# Altium PCB 第三版PCB_ASCII.pcbdoc (part 1 of 2)
Units mm, origin at the board's own origin, x right, y up, seen from the top; angles counter-clockwise.
Board outline 100 x 24 mm, 4 copper layers (Top Layer, GND, VCC, Bottom Layer), stack 0.568 mm thick; 97 components, 64 nets, 369 pads, 320 vias.
Unrouted connection lines stored in the file: 80.
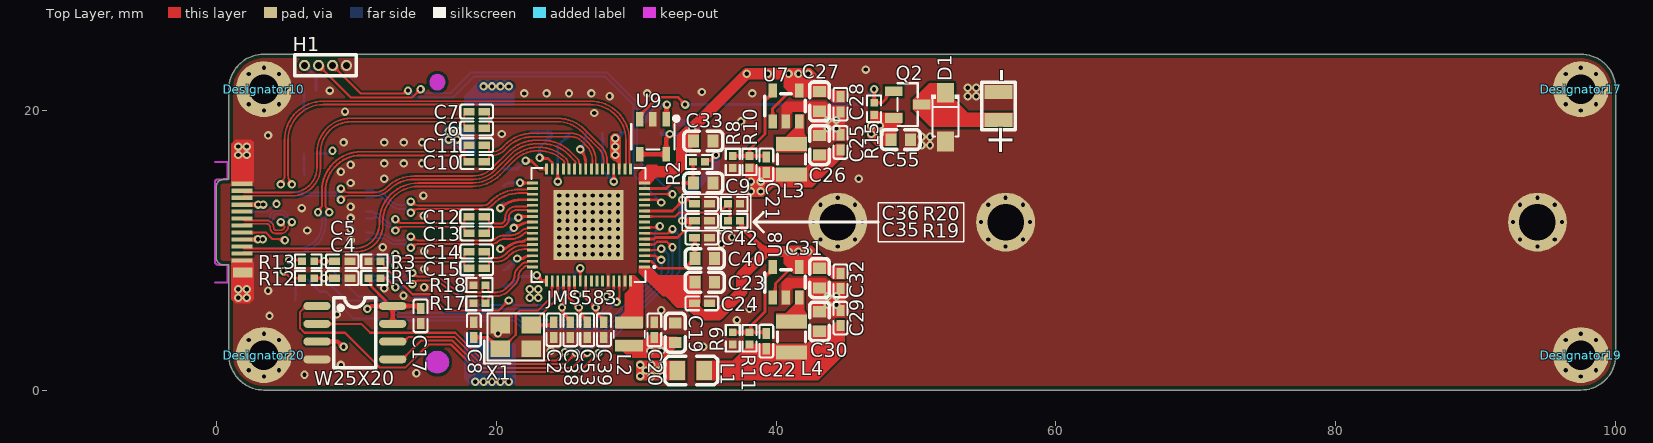
[diagram p0: Top Layer view]
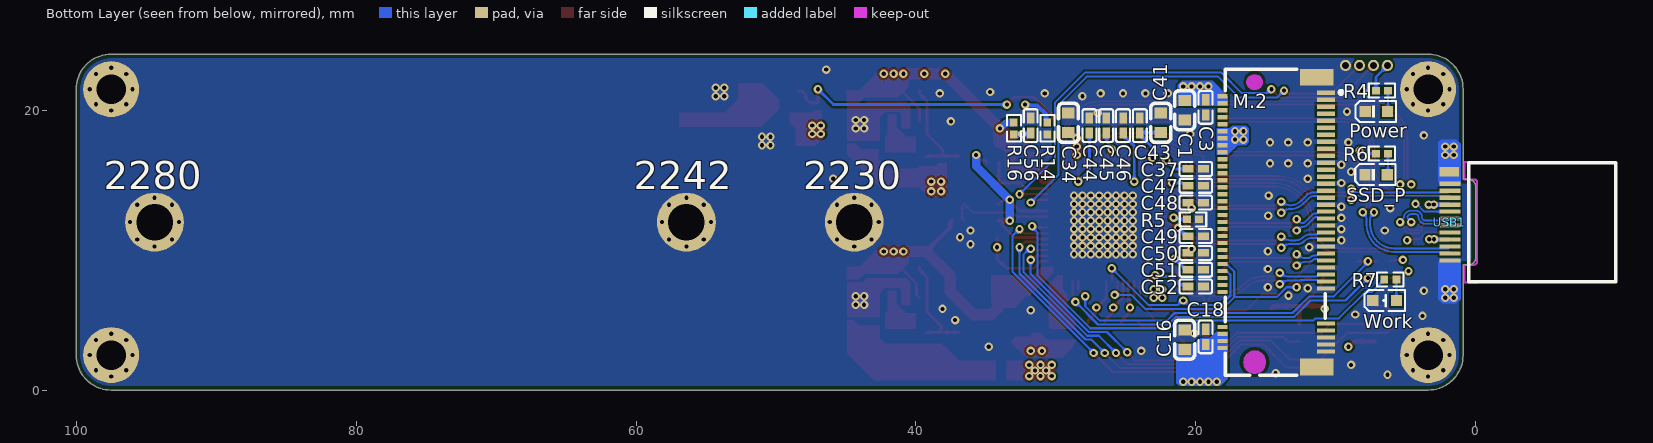
[diagram p1: Bottom Layer view, seen from below]
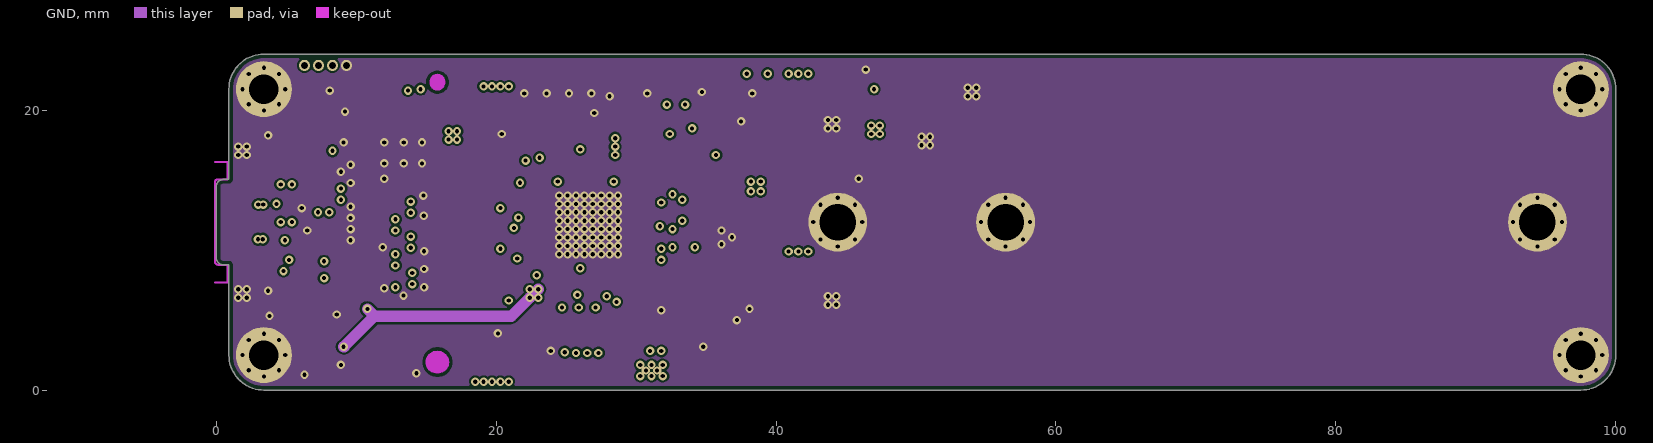
[diagram p2: GND]
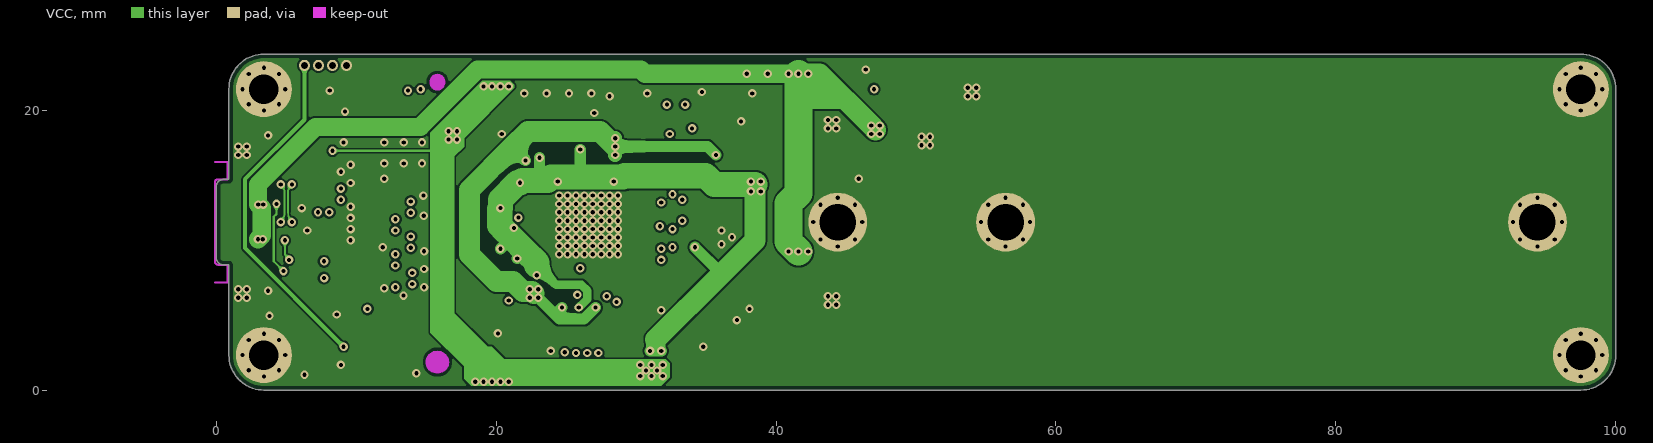
[diagram p3: VCC]

## Layer stack, top to bottom
Top Solder Mask Layer: solder mask 0.0102, Solder Resist, Dk 3.5
Top Layer: signal copper 0.035
Dielectric 1: prepreg 0.0711, PP-006, Dk 4.1
GND: signal copper 0.018
Dielectric1: dielectric 0.32, FR-4, Dk 4.8
VCC: signal copper 0.018
Dielectric 2: prepreg 0.0711, PP-006, Dk 4.1
Bottom Layer: signal copper 0.035
Bottom Solder Mask Layer: solder mask 0.0102, Solder Resist, Dk 3.5

## Board outline
0.9,2.5 0.9,8.95 0.5,8.95 cw(c0.5,9.45) 0,9.45 0,14.55 cw(c0.5,14.55) 0.5,15.05 0.9,15.05 0.9,21.5 cw(c3.4,21.5) 3.4,24 97.5,24 cw(c97.5,21.5) 100,21.5 100,2.5 cw(c97.5,2.5) 97.5,0 3.4,0 cw(c3.4,2.5)

## Design rules (kind name [scope] priority, off if disabled: settings)
BoardOutlineClearance copperThickness1oz_1 [All] p1: gap=0.254 ignorepadtopadclearanceinfootprint=FALSE except(0: Arc-SplitContinuation Track-SplitContinuation SMDPad-SplitContinuation THPad-SplitContinuation Via-SplitContinuation Fill-SplitContinuation Poly-SplitContinuation Region-SplitContinuation Text-SplitContinuation; 0.152: Track-CutoutEdge SMDPad-CutoutEdge THPad-CutoutEdge Via-CutoutEdge Region-CutoutEdge; 0.3: Track-OutlineEdge SMDPad-OutlineEdge THPad-OutlineEdge Via-OutlineEdge Fill-OutlineEdge Fill-CutoutEdge Poly-OutlineEdge Region-OutlineEdge Text-OutlineEdge)
BoardOutlineClearance copperThickness2oz_1 [All] p2: gap=0.254 ignorepadtopadclearanceinfootprint=FALSE except(0: Arc-SplitContinuation Track-SplitContinuation SMDPad-SplitContinuation THPad-SplitContinuation Via-SplitContinuation Fill-SplitContinuation Poly-SplitContinuation Region-SplitContinuation Text-SplitContinuation; 0.152: Track-CutoutEdge SMDPad-CutoutEdge THPad-CutoutEdge Via-CutoutEdge Region-CutoutEdge; 0.3: Track-OutlineEdge SMDPad-OutlineEdge THPad-OutlineEdge Via-OutlineEdge Fill-OutlineEdge Fill-CutoutEdge Poly-OutlineEdge Region-OutlineEdge Text-OutlineEdge)
Clearance "Stitching GND" [IsStitchingVia and InNet('GND') vs (IsVia and (Not IsStitchingVia)) Or IsPad] p1: gap=0.2 ignorepadtopadclearanceinfootprint=FALSE except(0: Arc-Text Arc-Hole Track-Text Track-Hole SMDPad-Text SMDPad-Hole THPad-Text THPad-Hole Via-Text Via-Hole Fill-Text Fill-Hole Poly-Text Poly-Hole Region-Text Region-Hole Text-Text Text-Hole)
Clearance copperThickness1oz [All] p2: gap=0.15 ignorepadtopadclearanceinfootprint=FALSE except(0: Arc-Text Arc-Hole Track-Text Track-Hole SMDPad-Via SMDPad-Text SMDPad-Hole THPad-Via THPad-Text THPad-Hole Via-Text Via-Hole Fill-Text Fill-Hole Poly-Text Poly-Hole Region-Text Region-Hole Text-Text Text-Hole; 0.12: Arc-Arc Arc-Track Arc-Via Track-Track Track-Via; 0.2: Via-Via)
ComponentClearance [All] p1: gap=0 collisioncheckmode=3 verticalgap=0.254 showdistances=FALSE
DiffPairsRouting DiffPairsRouting_90oum [InDifferentialPairClass('USB')] p1: maxlimit=0.254 minlimit=0.1 mostfreqgap=0.12 toplayer_minwidth=0.1 toplayer_maxwidth=0.381 toplayer_prefwidth=0.125 midlayer1_minwidth=0.1 midlayer1_maxwidth=0.381 midlayer1_prefwidth=0.125 midlayer2_minwidth=0.1 midlayer2_maxwidth=0.381 midlayer2_prefwidth=0.125 bottomlayer_minwidth=0.1 bottomlayer_maxwidth=0.381 bottomlayer_prefwidth=0.125 maxuncoupledlength=12.7
DiffPairsRouting DiffPairsRouting_85oum [InDifferentialPairClass('NVme')] p2: maxlimit=0.254 minlimit=0.1 mostfreqgap=0.12 toplayer_minwidth=0.1 toplayer_maxwidth=0.381 toplayer_prefwidth=0.145 midlayer1_minwidth=0.1 midlayer1_maxwidth=0.381 midlayer1_prefwidth=0.145 midlayer2_minwidth=0.1 midlayer2_maxwidth=0.381 midlayer2_prefwidth=0.145 bottomlayer_minwidth=0.1 bottomlayer_maxwidth=0.381 bottomlayer_prefwidth=0.145 maxuncoupledlength=12.7
MatchedLengths [All] p1: tolerance=2 checknetsindiffpair=TRUE checkdiffpairvsdiffpair=FALSE checkxsignals=FALSE checkothers=FALSE
PasteMaskExpansion pasteMaskExpansion [All] p1: expansion=0
PlaneConnect innerPlane [All] p1: planeconnectstyle=Direct reliefexpansion=0.508 reliefentries=4 reliefconductorwidth=0.254 reliefairgap=0.254
PolygonConnect copperRegion [All] p1: connectstyle=Direct reliefconductorwidth=0.254 reliefentries=4 polygonreliefangle="90 Angle" airgapwidth=0.254
RoutingVias viaSize [All] p1: holewidth=0.3 width=0.6 viastyle="Through Hole" minholewidth=0.3 minwidth=0.6 maxholewidth=6.3 maxwidth=10
SilkToSilkClearance [All] p1: silktosilkclearance=0
SilkToSolderMaskClearance [IsPad] p1: minsilkscreentomaskgap=0 clearancetoexposedcopper=TRUE
SolderMaskExpansion solderMaskExpansion [All] p1: expansion=0.051 istentingtop=FALSE useseparateexpansions=TRUE expansionbottom=0.051 istentingbottom=FALSE
SupplyNets "Schematic Supply Nets_5" [InNet('VCC')] p1: voltage=0.000
SupplyNets "Schematic Supply Nets_4" [InNet('M.2_3V3')] p2: voltage=0.000
SupplyNets "Schematic Supply Nets_3" [InNet('AVDDL')] p3: voltage=0.000
SupplyNets "Schematic Supply Nets_2" [InNet('GND')] p4: voltage=0.000
SupplyNets "Schematic Supply Nets_1" [InNet('VDDREG')] p5: voltage=0.000
SupplyNets "Schematic Supply Nets" [InNet('3V3')] p6: voltage=0.000
Width copperThickness1oz_2 [All] p1: maxlimit=5 minlimit=0.1 preferedwidth=0.254
24 further rules are at their usual default settings.

## Classes and differential pairs
differential pair class NVme: CLK N_P0_TX N_P1_TX P0_RX P0_TX P1_RX P1_TX
differential pair class USB: D RX1 RX2 TX1 TX2 U_TX1 U_TX2
differential pair N_P1_TX: +N_P1_TX_P -N_P1_TX_N
differential pair N_P0_TX: +N_P0_TX_P -N_P0_TX_N
differential pair U_TX2: +U_TX2_P -U_TX2_N
differential pair U_TX1: +U_TX1_P -U_TX1_N
differential pair TX2: +TX2_P -TX2_N
differential pair TX1: +TX1_P -TX1_N
differential pair RX2: +RX2_P -RX2_N
differential pair RX1: +RX1_P -RX1_N
differential pair P1_TX: +P1_TX_P -P1_TX_N
differential pair P1_RX: +P1_RX_P -P1_RX_N
differential pair P0_TX: +P0_TX_P -P0_TX_N
differential pair P0_RX: +P0_RX_P -P0_RX_N
differential pair D: +D_P -D_N
differential pair CLK: +CLK_P -CLK_N

## Components (designator, comment, footprint, x,y, rotation, side; value= is the part's Value field where it differs from the comment)
C1 "CAP_0603" C0603 20.8,20 r270 bottom
C2 "CL05B104KB54PNC" C0402 24.1,4.3 r90 top
C3 "CL05B104KB54PNC" C0402 19.3,20.2 r90 bottom
C4 "CL05B104KB54PNC" C0402 9,8 r0 top
C5 "CL05B104KB54PNC" C0402 9,9.2 r0 top
C6 "CL05B104KB54PNC" C0402 18.6,18.7 r0 top
C7 "CL05B104KB54PNC" C0402 18.6,19.9 r0 top
C8 "CL05B104KB54PNC" C0402 18.4,4.3 r270 top
C9 "CAP_0603" C0603 34.8,14.8 r180 top
C10 "CL05B104KB54PNC" C0402 18.6,16.3 r0 top
C11 "CL05B104KB54PNC" C0402 18.6,17.5 r0 top
C12 "CL05B104KB54PNC" C0402 18.6,12.4 r180 top
C13 "CL05B104KB54PNC" C0402 18.6,11.2 r180 top
C14 "CL05B104KB54PNC" C0402 18.6,9.9 r180 top
C15 "CL05B104KB54PNC" C0402 18.6,8.7 r180 top
C16 "CAP_0603" C0603 20.8,3.6 r90 bottom
C17 "CL05B104KB54PNC" C0402 14.6,5.3 r90 top
C18 "CL05B104KB54PNC" C0402 19.3,3.8 r270 bottom
C19 "CAP_0603" C0603 32.8,4.1 r270 top
C20 "CL05B104KB54PNC" C0402 31.3,4.3 r270 top
C21 "CL05B104KB54PNC" C0402 39.3,16.1 r90 top
C22 "CL05B104KB54PNC" C0402 39.3,3.5 r90 top
C23 "CAP_0603" C0603 34.9,7.7 r180 top
C24 "CL05B104KB54PNC" C0402 34.7,6.2 r180 top
C25 "CL05B104KB54PNC" C0402 44.6,17.7 r270 top
C26 "CAP_0603" C0603 43.1,17.5 r270 top
C27 "CAP_0603" C0603 43.1,20.625 r90 top
C28 "CL05B104KB54PNC" C0402 44.6,20.425 r90 top
C29 "CL05B104KB54PNC" C0402 44.6,5.145 r270 top
C30 "CAP_0603" C0603 43.1,4.9 r270 top
C31 "CAP_0603" C0603 43.1,8 r90 top
C32 "CL05B104KB54PNC" C0402 44.6,7.8 r90 top
C33 "CAP_0603" C0603 34.8,17.8 r180 top
C34 "CAP_0603" C0603 29.1,19.1 r270 bottom
C35 "CL05B104KB54PNC" C0402 34.7,12.1 r180 top
C36 "CL05B104KB54PNC" C0402 34.7,13.3 r180 top
C37 "CL05B104KB54PNC" C0402 20,15.8 r0 bottom
C38 "CL05B104KB54PNC" C0402 25.3,4.3 r90 top
C39 "CL05B104KB54PNC" C0402 27.7,4.3 r90 top
C40 "CAP_0603" C0603 34.9,9.4 r180 top
C41 "CAP_0603" C0603 22.5,19.1 r270 bottom
C42 "CL05B104KB54PNC" C0402 34.7,10.9 r180 top
C43 "CL05B104KB54PNC" C0402 24,18.9 r270 bottom
C44 "CL05B104KB54PNC" C0402 27.6,18.9 r270 bottom
C45 "CL05B104KB54PNC" C0402 26.4,18.9 r270 bottom
C46 "CL05B104KB54PNC" C0402 25.2,18.9 r270 bottom
C47 "CL05B104KB54PNC" C0402 20,14.6 r0 bottom
C48 "CL05B104KB54PNC" C0402 20,13.4 r0 bottom
C49 "CL05B104KB54PNC" C0402 20,11 r0 bottom
C50 "CL05B104KB54PNC" C0402 20,9.8 r0 bottom
C51 "CL05B104KB54PNC" C0402 20,8.6 r0 bottom
C52 "CL05B104KB54PNC" C0402 20,7.4 r0 bottom
C53 "CL05B104KB54PNC" C0402 26.5,4.3 r90 top
C55 "CAP_0603" C0603 48.9,17.9 r180 top
C56 "CL05B104KB54PNC" C0402 31.8,18.9 r90 bottom
D1 "FR107W_C18199114" SOD-123FL_L2.7-W1.8-LS3.8-RD 52.1,19.5 r270 top
Designator10 "Comment" M2_HOLE 3.4,21.5 r0 top locked
Designator17 "Comment" M2_HOLE 97.5,21.5 r0 top
Designator19 "Comment" M2_HOLE 97.5,2.5 r0 top
Designator20 "Comment" M2_HOLE 3.4,2.5 r0 top locked
H1 "ZX-PZ1.0-1-4PZZ" HDR-TH_ZX-PZ1.0-1-4PZZ 7.8,23.2 r0 top
JMS583 "JMS583" QFN-64_L8.0-W8.0-P0.40-TL-EP6.0 26.6,11.8 r180 top locked (schematic designator U6)
L1 "BLM21PG600SN1D" L0805 33.9,1.4 r180 top
L2 "FTC252010S4R7MBCA" IND-SMD_L2.5-W2.0-VLS252012CX-150M 29.5,4 r90 top
L3 "FTC252012S2R2MBCA" IND-SMD_L2.5-W2.0_MHCHL2520 41.1,16.5 r90 top
L4 "FTC252012S2R2MBCA" IND-SMD_L2.5-W2.0_MHCHL2520 41.1,3.8 r90 top
M.2 "91302-225-067RCM" CONN-SMD_91302-225-067RCM 14.4,12 r270 bottom locked (schematic designator U1)
Power "XL-1608PGC-06" LED0603-RD_GREEN 7.1,19.9 r180 bottom (schematic designator U2)
Q2 "HL3401A" SOT-23-3_L2.9-W1.3-P1.90-LS2.4-BR 49.4,20.4 r180 top
R1 "0402WGF1002TCE" R0402 11.3,8 r180 top
R2 "0402WGF1002TCE" R0402 34.5,16.3 r180 top
R3 "0402WGF1002TCE" R0402 11.3,9.2 r180 top
R4 "0402WGF1002TCE" R0402 6.7,21.4 r180 bottom
R5 "0402WGF1002TCE" R0402 20.2,12.2 r180 bottom
R6 "0402WGF1002TCE" R0402 6.7,16.9 r180 bottom
R7 "0402WGF1002TCE" R0402 6.1,7.9 r180 bottom
R8 "0402WGF1002TCE" R0402 36.9,16.3 r90 top
R9 "0402WGF1002TCE" R0402 36.9,3.7 r90 top
R10 "0402WGF1002TCE" R0402 38.1,16.3 r270 top
R11 "0402WGF1002TCE" R0402 38.1,3.7 r270 top
R12 "0402WGF1002TCE" R0402 6.567,8 r0 top
R13 "0402WGF1002TCE" R0402 6.567,9.2 r0 top
R14 "0402WGF4702TCE" R0402 30.6,18.7 r90 bottom
R15 "0402WGF1002TCE" R0402 47,20.1 r90 top
R16 "0402WGF1002TCE" R0402 33,18.7 r270 bottom
R17 "50Ω_1%" R0402 18.8,6.2 r180 top
R18 "50Ω_1%" R0402 18.8,7.5 r180 top
R19 "100kΩ" R0402 37,12.1 r180 top
R20 "200kΩ" R0402 37,13.3 r0 top
SSD_P "XL-1608PGC-06" LED0603-RD_GREEN 7.119,15.389 r180 bottom (schematic designator U3)
U7 "ETA3409S2F" SOT-23-5_L2.9-W1.6-P0.95-LS2.8-BL 40.7,20.3 r0 top
U8 "ETA3409S2F" SOT-23-5_L2.9-W1.6-P0.95-LS2.8-BL 40.7,7.7 r0 top
U9 "TMP709AIDBVR(UMW)" SOT-23-5_L3.0-W1.5-P0.95-LS2.8-BL 31.2,18.1 r180 top
USB1 "U261-241N-4BS60" USB-TYPE-C-SMD_U261-241N-4BS60 1.875,12 r90 bottom locked
W25X20 "W25X20CLSNIG" SOIC-8_L5.0-W4.0-P1.27-LS6.0-BL 9.9,4.1 r270 top (schematic designator U4)
Work "XL-1608UBC-06A" LED0603-R-RD 6.5,6.4 r180 bottom (schematic designator U5)
X1 "XL2EL89CSI-111YLC-25M" CRYSTAL-SMD_4P-L3.2-W2.5-BL 21.4,3.8 r0 top

## Footprints (in the part's own frame and the unit in brackets; to place one, negate y for a bottom-side part, rotate by r counter-clockwise, add the part's x,y. Pads: shape width x height; smd on the part's side, far side on the other; paste and mask are expansions set on the pad)
C0402 [mm]
  rect 0.79x0.54 smd paste-100 mask+0.051: 1(-0.545,0) 2(0.545,0)
  silkscreen extent -1.17,-0.5 1.17,0.5
C0603 [mm]
  rect 0.8x0.9 smd: 1(-0.7,0) 2(0.7,0)
  silkscreen extent -1.39,-0.71 1.39,0.71
CONN-SMD_91302-225-067RCM [mm]
  rect 0.3x1.3 smd: 1(-9.25,3.7) 3(-8.75,3.7) 5(-8.25,3.7) 7(-7.75,3.7) 9(-7.25,3.7) 11(-6.75,3.7) 13(-6.25,3.7) 15(-5.75,3.7) 17(-5.25,3.7) 19(-4.75,3.7) 21(-4.25,3.7) 23(-3.75,3.7) 25(-3.25,3.7) 27(-2.75,3.7) 29(-2.25,3.7) 31(-1.75,3.7) 33(-1.25,3.7) 35(-0.75,3.7) 37(-0.25,3.7) 39(0.25,3.7) 41(0.75,3.7) 43(1.25,3.7) 45(1.75,3.7) 47(2.25,3.7) 49(2.75,3.7) 51(3.25,3.7) 53(3.75,3.7) 55(4.25,3.7) 57(4.75,3.7) 67(7.25,3.7) 69(7.75,3.7) 71(8.25,3.7) 73(8.75,3.7) 75(9.25,3.7)
  rect 0.3x0.7 smd: 2(-9,-3.7) 4(-8.5,-3.7) 6(-8,-3.7) 8(-7.5,-3.7) 10(-7,-3.7) 12(-6.5,-3.7) 14(-6,-3.7) 16(-5.5,-3.7) 18(-5,-3.7) 20(-4.5,-3.7) 22(-4,-3.7) 24(-3.5,-3.7) 26(-3,-3.7) 28(-2.5,-3.7) 30(-2,-3.7) 32(-1.5,-3.7) 34(-1,-3.7) 36(-0.5,-3.7) 38(0,-3.7) 40(0.5,-3.7) 42(1,-3.7) 44(1.5,-3.7) 46(2,-3.7) 48(2.5,-3.7) 50(3,-3.7) 52(3.5,-3.7) 54(4,-3.7) 56(4.5,-3.7) 58(5,-3.7) 68(7.5,-3.7) 70(8,-3.7) 72(8.5,-3.7) 74(9,-3.7)
  rect 1.2x2.4 smd: 76(-10.35,3.05) 77(10.35,3.05)
  Board Outline Layer board cut-out: 9.2,-1.4 9.261,-1.706 9.434,-1.966 9.694,-2.139 10,-2.2 10,-2.2 10.306,-2.139 10.566,-1.966 10.739,-1.706 10.8,-1.4 10.8,-1.4 10.739,-1.094 10.566,-0.834 10.306,-0.661 10,-0.6 10,-0.6 9.694,-0.661 9.434,-0.834 9.261,-1.094 9.2,-1.4
  Board Outline Layer board cut-out: -10,-1.95 -10.21,-1.908 -10.389,-1.789 -10.508,-1.611 -10.55,-1.4 -10.55,-1.4 -10.508,-1.19 -10.389,-1.011 -10.21,-0.892 -10,-0.85 -10,-0.85 -9.789,-0.892 -9.611,-1.011 -9.492,-1.19 -9.45,-1.4 -9.45,-1.4 -9.492,-1.611 -9.611,-1.789 -9.789,-1.908 -10,-1.95
  Board Outline Layer circle w0.8: c10,-1.4 r0.4
  Board Outline Layer circle w0.005: c-10,-1.4 r0.55
  Board Outline Layer circle w0.7: c-10,-1.4 r0.2
  silkscreen extent -10.92,-3.5 10.92,4.9
CRYSTAL-SMD_4P-L3.2-W2.5-BL [mm]
  rect 1.4x1.2 smd: 1(-1.1,-0.85) 2(1.1,-0.85) 3(1.1,0.85) 4(-1.1,0.85)
  silkscreen extent -2.26,-1.91 2.03,1.68
HDR-TH_ZX-PZ1.0-1-4PZZ [mm]
  round 0.8 hole 0.5: 1(-1.5,0) 2(-0.5,0) 3(0.5,0) 4(1.5,0)
  silkscreen extent -2.2,-0.75 2.2,0.75
IND-SMD_L2.5-W2.0-VLS252012CX-150M [mm]
  rect 0.85x2 smd: 1(-0.83,0) 2(0.83,0)
  silkscreen extent -0.29,-1.1 0.29,1.1
IND-SMD_L2.5-W2.0_MHCHL2520 [mm]
  rect 1x2.2 smd: 1(-1.1,0) 2(1.1,0)
  silkscreen extent -0.37,-1 0.37,1
L0805 [mm]
  rect 1.133x1.377 smd paste-100 mask+0.051: 1(-0.966,0) 2(0.966,0)
  silkscreen extent -1.95,-1.02 1.86,1.02
LED0603-R-RD [mm]
  rect 0.8x0.8 smd: 1(0.851,0) 2(-0.851,0)
  silkscreen extent -1.44,-0.75 1.44,0.75
LED0603-RD_GREEN [mm]
  rect 0.8x0.8 smd: 1(-0.799,-0.003) 2(0.799,0.003)
  silkscreen extent -1.49,-0.75 1.39,0.76
M2_HOLE [mm]
  round 4 hole 2.1: 16(0,0)
QFN-64_L8.0-W8.0-P0.40-TL-EP6.0 [mm]
  rect 0.8x0.2 smd paste-100 mask+0.051: 1(-4,3) 2(-4,2.6) 3(-4,2.2) 4(-4,1.8) 5(-4,1.4) 6(-4,1) 7(-4,0.6) 8(-4,0.2) 9(-4,-0.2) 10(-4,-0.6) 11(-4,-1) 12(-4,-1.4) 13(-4,-1.8) 14(-4,-2.2) 15(-4,-2.6) 16(-4,-3) 33(4,-3) 34(4,-2.6) 35(4,-2.2) 36(4,-1.8) 37(4,-1.4) 38(4,-1) 39(4,-0.6) 40(4,-0.2) 41(4,0.2) 42(4,0.6) 43(4,1) 44(4,1.4) 45(4,1.8) 46(4,2.2) 47(4,2.6) 48(4,3)
  rect 0.2x0.8 smd paste-100 mask+0.051: 17(-3,-4) 18(-2.6,-4) 19(-2.2,-4) 20(-1.8,-4) 21(-1.4,-4) 22(-1,-4) 23(-0.6,-4) 24(-0.2,-4) 25(0.2,-4) 26(0.6,-4) 27(1,-4) 28(1.4,-4) 29(1.8,-4) 30(2.2,-4) 31(2.6,-4) 32(3,-4) 49(3,4) 50(2.6,4) 51(2.2,4) 52(1.8,4) 53(1.4,4) 54(1,4) 55(0.6,4) 56(0.2,4) 57(-0.2,4) 58(-0.6,4) 59(-1,4) 60(-1.4,4) 61(-1.8,4) 62(-2.2,4) 63(-2.6,4) 64(-3,4)
  rect 5x5 smd paste-100 mask+0.051: 65(0,0)
  silkscreen extent -4.77,-4.08 4.08,4.08
R0402 [mm]
  rect 0.566x0.54 smd paste-100 mask+0.051: 1(-0.433,0) 2(0.433,0)
  silkscreen extent -0.94,-0.5 0.94,0.5
SOD-123FL_L2.7-W1.8-LS3.8-RD [mm]
  rect 1.4x1.2 smd: 1(-1.735,0) 2(1.735,0)
  silkscreen extent -1.6,-1 1.38,1
SOIC-8_L5.0-W4.0-P1.27-LS6.0-BL [mil]
  oval 22.38x76.78 smd: 1(-75,-106.5) 2(-25,-106.5) 3(25,-106.5) 4(75,-106.5) 5(75,106.5) 6(25,106.5) 7(-25,106.5) 8(-75,106.5)
  silkscreen extent -98,-59 98,59
SOT-23-3_L2.9-W1.3-P1.90-LS2.4-BR [mm]
  rect 1.25x0.7 smd paste+0 mask+0.051: 1(1,-0.95) 2(1,0.95) 3(-1,0)
  silkscreen extent -0.73,-1.53 0.73,1.53
SOT-23-5_L2.9-W1.6-P0.95-LS2.8-BL [mm]
  rect 0.6x1 smd paste+0 mask+0.05: 1(-0.95,-1.1) 2(0,-1.1) 3(0.95,-1.1) 4(0.95,1.1) 5(-0.95,1.1)
  silkscreen extent -1.52,-0.7 1.4,0.89
SOT-23-5_L3.0-W1.5-P0.95-LS2.8-BL [mm]
  rect 0.532x1.045 smd: 1(-0.95,-1.25) 2(0,-1.25) 3(0.95,-1.25) 4(0.95,1.25) 5(-0.95,1.25)
  silkscreen extent -1.82,-1.45 1.55,0.9
USB-TYPE-C-SMD_U261-241N-4BS60 [mm]
  rect 0.7x1.4 smd far side paste+0 mask+0.05: 1(-3.6,0.025)
  rect 0.7x1.4 smd paste+0 mask+0.05: 2(3.6,0.025)
  rect 0.3x1.5 smd paste+0 mask+0.05: A1(2.75,-0.025) A2(2.25,-0.025) A3(1.75,-0.025) A4(1.25,-0.025) A5(0.75,-0.025) A6(0.25,-0.025) A7(-0.25,-0.025) A8(-0.75,-0.025) A9(-1.25,-0.025) A10(-1.75,-0.025) A11(-2.25,-0.025) A12(-2.75,-0.025)
  rect 0.3x1.5 smd far side paste+0 mask+0.05: B1(-2.75,-0.025) B2(-2.25,-0.025) B3(-1.75,-0.025) B4(-1.25,-0.025) B5(-0.75,-0.025) B6(-0.25,-0.025) B7(0.25,-0.025) B8(0.75,-0.025) B9(1.25,-0.025) B10(1.75,-0.025) B11(2.25,-0.025) B12(2.75,-0.025)
  Board Outline Layer lines w0.15: 2.86,-1.975 ccw(c2.86,-1.785) 3.05,-1.785 ; 2.86,-1.975 ccw(c2.86,-1.785) 3.05,-1.785 ; 2.86,-1.975 -2.741,-1.975 2.86,-1.975 ; 3.05,-1.785 3.05,-1.075 ; 3.05,-1.785 3.05,-1.075 ; -3.05,-1.719 ccw(c-2.794,-1.719) -2.794,-1.975 cw(c-2.794,-1.719) -3.05,-1.719 ; -3.05,-1.719 -3.05,-1.7 ; -3.05,-1.719 -3.05,-1.7 ; -3.05,-1.7 -3.05,-1.075 ; -3.05,-1.7 -3.05,-1.075 ; -4.3,-1.075 -4.3,-1.975 -4.3,-1.075 ; -4.3,-1.075 -3.05,-1.075 ; -4.3,-1.075 -3.05,-1.075 ; 3.05,-1.075 4.3,-1.075 ; 3.05,-1.075 4.3,-1.075 ; 4.3,-1.075 4.3,-1.975 4.3,-1.075
  silkscreen extent -4.25,-11.89 4.25,-1.38

## Part data
R17 R18 R19 R20: library part 0402WGF1002TCE, JLCPCB Part Class=基础库, LCSC Part Name="10kΩ ±1% 62.5mW 厚膜电阻", Manufacturer=UNI-ROYAL(厚声), Operating Temperature=-55℃~+155℃, Power(Watts)=62.5mW, Temperature Coefficient=±100ppm/℃, Tolerance=±1%, Voltage-Supply(Max)=50V, Add into BOM=yes, Convert to PCB=yes, Datasheet=https://item.szlcsc.com/datasheet/0402WGF1002TCE/26487.html, Device=0402WGF1002TCE, Manufacturer Part=0402WGF1002TCE, Supplier=LCSC, Supplier Footprint=0402, Symbol=0402WGF1002TCE, Type=厚膜电阻

## Free pads (board coordinates)
  rect 2x1 smd paste+0 mask+0.05: 1(55.9,19.3) 2(55.9,21.3)
  round 4.2 hole 2.6: 16(44.4,12) 16(56.4,12) 16(94.4,12)

## Via types
v1: diameter 0.6, hole 0.3, Top Layer to Bottom Layer, tented both sides, 320 vias

## Nets (pads, with @x,y where several pads share a name; then routed paths per layer and width w, separated by ;. In a path a pad name is that pad's centre, name@x,y a point inside that pad or via, vN(x,y) a via of type N, cw(c..) or ccw(c..) an arc to the next point about the centre after c; other vN are vias at no path point)
3V3: C22.1 C29.2 C30.2 L1.1 L4.1 R11.2
$1N3363: R6.2 SSD_P.2 | length 1.5
  Bottom Layer w0.15: R6.2@6.267,16.9 6.267,15.445 SSD_P.2@6.319,15.392
$1N3561: R7.2 Work.1 | length 1.5
  Bottom Layer w0.15: Work.1@5.649,6.4 5.667,6.418 R7.2@5.667,7.9
$1N4495: JMS583.39 R5.1 | length 2
  Top Layer w0.2: v1(21.59,12.322) 21.707,12.372 cw(c21.841,12.059) 21.841,12.4 JMS583.39@22.6,12.4
  Bottom Layer w0.2: R5.1@20.633,12.2 21.295,12.2 ccw(c21.295,12.617) v1(21.59,12.322)
$1N10279: C22.2 R9.2 R11.1 U8.5 | length 7.8
  Top Layer w0.2: R9.2@36.9,4.133 R11.1@38.1,4.133 ; C22.2@39.3,4.045 39.212,4.133 R11.1@38.1,4.133 ; U8.5@39.75,8.8 39.75,8.6 39.2,8.05 39.2,5.6 38.198,4.598 38.198,4.231 R11.1@38.1,4.133
$1N10317: L4.2 U8.3
$1N10953: Power.2 R4.2 | length 1.5
  Bottom Layer w0.15: R4.2@6.267,21.4 6.267,19.937 Power.2@6.301,19.903
$1N11538: L3.2 U7.3
$1N11540: C21.2 R8.2 R10.1 U7.5 | length 7.8
  Top Layer w0.2: R8.2@36.9,16.733 R10.1@38.1,16.733 ; C21.2@39.3,16.645 39.212,16.733 R10.1@38.1,16.733 ; U7.5@39.75,21.4 39.75,21.2 39.2,20.65 39.2,18.3 38.1,17.2 R10.1@38.1,16.733
$1N22897: R14.2 U9.1 | length 3.5
  Top Layer w0.3: U9.1@32.15,19.35 32.175,19.375 32.175,20.375 v1(32.2,20.4)
  Bottom Layer w0.3: R14.2@30.6,19.146 30.72,19.266 30.72,19.72 31.343,20.343 32.143,20.343 v1(32.2,20.4)
$1N22946: C56.1 R16.2 U9.4 U9.5 | length 4.7
  Top Layer w0.3: U9.4@30.25,16.85 U9.5@32.15,16.85 32.15,17.969 32.4,18.219 v1(32.4,18.3)
  Bottom Layer w0.3: C56.1@31.8,18.355 31.844,18.311 32.956,18.311 R16.2@33,18.267
$1N23051: Q2.1 R15.2 U9.3 | length 21.1
  Top Layer w0.2: U9.3@30.25,19.35 30.25,19.607 31.564,20.92 32.98,20.92 v1(33.5,20.4) ; v1(47,21.5) R15.2@47,20.533 47.57,20.533 47.875,20.838 47.875,21.1 48.125,21.35 Q2.1@48.4,21.35
  Bottom Layer w0.2: v1(33.5,20.4) 45.9,20.4 v1(47,21.5)
$1N23334: D1.1 pad.1 Q2.3
AVDDL: C19.2 C20.2 C21.1 C25.2 C26.2 C40.2 C41.2 C42.2 C43.2 C44.2 C45.2 C46.2 C47.2 C48.2 C49.2 C50.2 C51.2 C52.2 C53.2 JMS583.2 JMS583.20 JMS583.25 JMS583.30 JMS583.31 JMS583.33 JMS583.36 JMS583.40 JMS583.43 JMS583.46 JMS583.49 JMS583.53 L2.1 L3.1 R10.2 | length 97.2
  Top Layer w0.2: v1(20.3,10.1) 20.575,10.1 ccw(c20.574,10.3) 20.707,10.151 cw(c21.929,8.794) 21.889,10.619 ccw(c21.883,10.819) 22.023,10.677 cw(c22.2,10.5) 22.17,10.748 JMS583.43@22.599,10.8 ; v1(20.3,13) cw(c21.749,11.551) 21.749,13.6 JMS583.36@22.6,13.6 ; v1(21.264,11.592) 21.773,11.834 cw(c22.507,10.293) 22.099,11.95 22.3,12 JMS583.40@22.6,12 ; v1(21.5,9.4) 21.866,9.4 ccw(c21.865,9.6) 22.013,9.466 cw(c22.2,9.3) 22.17,9.548 JMS583.46@22.599,9.6 ; v1(21.7,14.82) 21.7,14.8 JMS583.33@22.6,14.8 ; v1(22.9,8.2) 23.3,7.8 JMS583.49@23.6,7.8 ; v1(23.1,16.6) 23.146,16.554 23.7,16.554 24,16.253 JMS583.31@24,15.8 ; v1(24.4,14.9) JMS583.30@24.4,15.8 ; JMS583.53@25.2,7.8 25.2,6.6 v1(25.9,5.9) 25.977,5.823 25.977,5.494 26.5,4.97 C53.2@26.5,4.845 ; v1(26,17.2) cw(c25.034,16.234) 26.4,16.234 JMS583.25@26.4,15.8 ; v1(28.4,14.9) JMS583.20@28.4,15.8 ; JMS583.2@30.6,9.2 31.1,9.2 31.6,8.7 33.5,8.7 33.85,9.05 33.9,9.05 34.2,9.35 C40.2@34.2,9.4 34.2,10.855 C42.2@34.155,10.9
  VCC w0.6: v1(22.9,8.2) 22.9,8.9 24.28,7.52 26.098,7.52 26.52,7.098 26.52,6.502 26.098,6.08 26.08,6.08 v1(25.9,5.9)
  VCC w0.8: 20.25,11.75 20.408,11.592 ; v1(20.3,10.1) 21.05,10.85 21.15,10.85 ; v1(21.5,9.4) 22.05,9.95 ; v1(23.1,16.6) 23.1,15.56 23.68,14.98 ; v1(26,17.2) 26,15.32 26.1,15.22 ; v1(31,2.8) v1(31.8,2.8) ; v1(34.2,10.2) 36.05,8.35 36.05,8.25
  VCC w1.5: 31.4,3.6 36.05,8.25 38.5,10.7 38.5,14.7
  VCC w1.8: 20.25,11.75 v1@20.25,12.95 ; v1(20.3,13) 20.3,13.6 21.52,14.82 v1(21.7,14.82) 21.86,14.98 23.68,14.98 23.92,15.22 26.1,15.22 29.07,15.22 29.17,15.32 34.967,15.32 35.587,14.7 38.5,14.7 ; 20.408,11.592 21.15,10.85 22.05,9.95 22.9,9.1 22.9,8.9
  Bottom Layer w0.2: v1(20.3,13) cw(c20.674,13) 20.41,13.264 C48.2@20.545,13.4 ; C52.2@20.545,7.4 20.662,7.517 21.117,7.517 21.723,8.123 22.823,8.123 v1(22.9,8.2) ; C51.2@20.545,8.6 ccw(c20.545,8.974) 20.81,8.71 v1(21.5,9.4) ; C49.2@20.545,11 ccw(c20.545,11.307) 20.762,11.09 v1(21.264,11.592) ; C47.2@20.545,14.6 cw(c21.076,14.069) 21.076,14.82 v1(21.7,14.82) ; C41.2@22.5,18.4 C43.2@23.955,18.4 ; v1(23.1,16.6) 23.1,17.33 23.955,18.185 C43.2@23.955,18.4 ; C43.2@24,18.355 C43.2@23.955,18.4 ; v1(24.4,14.9) 24.4,17.43 25.2,18.23 C46.2@25.2,18.355 ; v1(26,17.2) ccw(c25.034,18.166) 26.4,18.166 C45.2@26.4,18.355 ; C44.2@27.6,18.355 27.6,15.7 v1(28.4,14.9)
  other v1: 38.2,14.2 38.9,14.2 38.2,14.9 38.9,14.9
CC1: C4.1 JMS583.62 R12.2 | length 26
  Top Layer w0.15: R12.2@7,8 v1(7.7,8) C4.1@8.455,8 ; v1(28.6,6.3) 28.6,6.422 28.8,6.622 JMS583.62@28.8,7.8
  Bottom Layer w0.15: v1(7.7,8) 9.3,6.4 11.8,6.4 12.965,5.235 21.415,5.235 21.96,4.69 26.99,4.69 v1(28.6,6.3)
CC2: C5.1 JMS583.61 R13.2 | length 25.9
  Top Layer w0.15: R13.2@7,9.2 v1(7.7,9.2) C5.1@8.455,9.2 ; v1(27.9,6.7) 28.4,7.2 JMS583.61@28.4,7.8
  Bottom Layer w0.15: v1(7.7,9.2) 7.7,9.132 10.132,6.7 11.9,6.7 13.095,5.505 21.527,5.505 22.072,4.96 26.86,4.96 27.9,6 v1(27.9,6.7)
CLK_N: JMS583.47 M.2.53 R18.1 | length 14.4
  Top Layer w0.14: v1(14,8.37) cw(c14,8.269) 14.072,8.34 14.177,8.235 ccw(c14.503,8.561) 14.503,8.1 15.265,8.1 cw(c15.265,6.29) 16.544,7.57 ccw(c17.968,8.994) 17.968,6.98 ; 17.9,6.98 17.968,6.98 ; JMS583.47@22.6,9.2 22.35,9.2 ccw(c22.35,9.081) 22.265,9.165 cw(c22.18,9.25) 22.18,9.13 ccw(c22.18,8.608) 21.811,8.977 21.529,8.695 ccw(c22.04,8.185) 21.318,8.185 cw(c20.596,8.185) 21.107,7.674 20.716,7.284 cw(c19.983,8.017) 19.983,6.98 19.586,6.98 cw(c19.586,7.12) 19.487,7.021 cw(c19.586,7.12) 19.446,7.12 19.446,7.159 ccw(c19.104,7.159) 19.346,7.4 19.246,7.5 R18.1@19.233,7.5 19.22,7.5 19.104,7.384 ccw(c19.307,7.181) 19.02,7.181 19.02,7.12 cw(c18.88,7.12) 18.979,7.021 cw(c18.88,7.12) 18.88,6.98 17.968,6.98
  Bottom Layer w0.14: M.2.53@10.7,8.25 11.115,8.25 cw(c11.115,8.045) M.2.53@11.26,8.19 ; v1(14,8.37) ccw(c14,8.269) 13.928,8.34 cw(c13.348,8.92) 13.348,8.1 12.644,8.1 cw(c12.644,8.151) 12.608,8.115 ccw(c12.571,8.079) 12.571,8.13 11.405,8.13 ; M.2.53@11.26,8.19 ccw(c11.405,8.335) 11.405,8.13 ; M.2.53@11.26,8.19 ccw(c11.405,8.335) 11.405,8.13
CLK_P: JMS583.48 M.2.55 R17.1 | length 14.4
  Top Layer w0.14: v1(14,7.57) ccw(c14,7.671) 14.072,7.6 14.177,7.705 cw(c14.503,7.379) 14.503,7.84 15.157,7.84 cw(c15.157,6.03) 16.424,7.322 ; 17.861,6.72 cw(c17.861,8.734) 16.436,7.31 ; 17.9,6.72 18.88,6.72 cw(c18.88,6.58) 18.979,6.679 cw(c18.88,6.58) 19.02,6.58 19.02,6.519 ccw(c19.307,6.519) 19.104,6.316 19.22,6.2 R17.1@19.233,6.2 19.246,6.2 19.346,6.3 ccw(c19.104,6.541) 19.446,6.541 19.446,6.58 cw(c19.586,6.58) 19.487,6.679 cw(c19.586,6.58) 19.586,6.72 20.024,6.72 ccw(c20.024,7.918) 20.871,7.071 21.367,7.567 ccw(c20.856,8.077) 21.578,8.077 cw(c22.3,8.077) 21.789,8.587 21.995,8.793 cw(c22.18,8.608) 22.18,8.87 cw(c22.18,8.75) 22.265,8.835 ccw(c22.35,8.92) 22.35,8.8 JMS583.48@22.6,8.8 ; 16.424,7.322 cw(c15.157,6.03) 16.436,7.31 ; 16.424,7.322 16.436,7.31
  Bottom Layer w0.14: M.2.55@10.7,7.75 11.115,7.75 ccw(c11.115,7.955) M.2.55@11.26,7.81 ; M.2.55@11.223,7.75 cw(c11.278,7.75) 11.239,7.789 M.2.55@11.26,7.81 ; v1(14,7.57) cw(c14,7.671) 13.928,7.6 ccw(c13.348,7.02) 13.348,7.84 12.536,7.84 cw(c12.536,7.891) 12.5,7.855 ccw(c12.464,7.819) 12.464,7.87 11.405,7.87 ; M.2.55@11.26,7.81 cw(c11.405,7.665) 11.405,7.87 ; M.2.55@11.26,7.81 11.271,7.821 cw(c11.389,7.704) 11.389,7.87 11.405,7.87
D_N: JMS583.17 USB1.A7 USB1.B7 | length 44
  Top Layer w0.125: USB1.B7@1.9,12.25 ccw(c2.027,12.25) 2.027,12.122 3.578,12.122 cw(c3.578,11.6) 4.1,11.6 ccw(c4.275,11.6) 4.275,11.425 4.599,11.425 ccw(c4.599,11.703) 4.796,11.507 4.841,11.551 ccw(c4.752,11.64) 4.877,11.64 ccw(c4.752,11.64) 4.841,11.728 4.622,11.947 cw(c4.675,12) v1(4.6,12) ; v1(4.6,14.7) cw(c4.675,14.7) 4.622,14.753 ccw(c4.005,15.37) 4.877,15.37 4.877,17.86 cw(c7.662,17.86) 7.662,20.645 26.737,20.645 cw(c26.737,17.86) 29.522,17.86 29.522,16.232 ccw(c29.655,16.232) 29.561,16.139 cw(c29.468,16.045) 29.6,16.045 JMS583.17@29.6,15.8
  VCC w0.125: v1(4.6,12) cw(c4.675,12) 4.622,12.053 ccw(c4.005,12.67) 4.877,12.67 4.877,14.195 ccw(c4.404,14.195) 4.739,14.53 4.622,14.647 cw(c4.675,14.7) v1(4.6,14.7)
  Bottom Layer w0.125: USB1.A7@1.9,11.75 cw(c2.027,11.75) 2.027,11.877 3.577,11.877 ccw(c3.577,12.4) 4.1,12.4 cw(c4.275,12.4) 4.275,12.575 4.599,12.575 cw(c4.599,12.297) 4.796,12.493 4.841,12.449 cw(c4.752,12.36) 4.877,12.36 cw(c4.752,12.36) 4.841,12.272 4.622,12.053 ccw(c4.675,12) v1(4.6,12)
D_P: JMS583.18 USB1.A6 USB1.B6 | length 44
  Top Layer w0.125: USB1.B6@1.9,11.75 cw(c2.027,11.75) 2.027,11.877 3.578,11.877 cw(c3.578,11.6) 3.855,11.6 ccw(c4.275,11.6) 4.275,11.18 4.599,11.18 ccw(c4.599,11.703) 4.969,11.333 5.05,11.414 ccw(c4.875,11.589) 5.122,11.589 cw(c5.37,11.589) 5.195,11.764 5.378,11.947 ccw(c5.325,12) v1(5.4,12) ; v1(5.4,14.7) ccw(c5.325,14.7) 5.378,14.753 cw(c5.995,15.37) 5.122,15.37 5.122,17.86 cw(c7.662,17.86) 7.662,20.4 26.737,20.4 cw(c26.737,17.86) 29.277,17.86 29.277,16.232 cw(c29.145,16.232) 29.239,16.139 ccw(c29.332,16.045) 29.2,16.045 JMS583.18@29.2,15.8
  VCC w0.125: v1(5.4,12) ccw(c5.325,12) 5.378,12.053 cw(c5.995,12.67) 5.122,12.67 5.122,14.195 cw(c5.596,14.195) 5.261,14.53 5.378,14.647 ccw(c5.325,14.7) v1(5.4,14.7)
  Bottom Layer w0.125: USB1.A6@1.9,12.25 ccw(c2.027,12.25) 2.027,12.122 3.577,12.122 ccw(c3.577,12.4) 3.855,12.4 cw(c4.275,12.4) 4.275,12.82 4.599,12.82 cw(c4.599,12.297) 4.969,12.667 5.05,12.586 cw(c4.875,12.411) 5.122,12.411 ccw(c5.37,12.411) 5.195,12.236 5.378,12.053 cw(c5.325,12) v1(5.4,12)
GND: C1.2 C2.1 C3.1 C4.2 C5.2 C8.1 C9.1 C16.2 C17.1 C18.1 C19.1 C20.1 C23.1 C24.1 C25.1 C26.1 C27.1 C28.1 C29.1 C30.1 C31.1 C32.1 C33.1 C34.1 C35.1 C36.1 C37.1 C38.1 C39.1 C40.1 C41.1 C42.1 C43.1 C44.1 C45.1 C46.1 C47.1 C48.1 C49.1 C50.1 C51.1 C52.1 C53.1 C55.1 C56.2 D1.2 Designator10.16 Designator17.16 Designator19.16 Designator20.16 H1.4 JMS583.60 JMS583.63 JMS583.65 M.2.1 M.2.3 M.2.9 M.2.15 M.2.21 M.2.27 M.2.33 M.2.39 M.2.45 M.2.51 M.2.57 M.2.71 M.2.73 M.2.75 M.2.76 M.2.77 pad.2 pad.16 Power.1 R3.2 R5.2 R8.1 R9.1 R14.1 R17.2 R18.2 R20.2 SSD_P.1 U7.2 U8.2 U9.2 USB1.1 USB1.2 USB1.A1 USB1.A12 USB1.B1 USB1.B12 W25X20.4 Work.2 X1.2 X1.4
  other v1: 3.4,0.975 97.5,0.975 6.3,1.1 14.3,1.2 2.322,1.422 4.478,1.422 96.422,1.422 98.578,1.422 8.9,1.8 1.875,2.5 4.925,2.5 95.975,2.5 99.025,2.5 23.9,2.8 34.8,3.1 2.322,3.578 4.478,3.578 96.422,3.578 98.578,3.578 3.4,4.025 97.5,4.025 20.125,4.05 37.2,5 3.8,5.3 8.6,5.4 31.8,5.7 38.1,5.8 43.7,6.1 44.3,6.1 1.575,6.6 2.175,6.6 43.7,6.7 44.3,6.7 13.375,6.75 3.7,7.1 1.575,7.2 2.175,7.2 12,7.275 14.85,7.35 14.85,8.65 24.5,9.7 25.1,9.7 25.7,9.7 26.3,9.7 26.9,9.7 27.5,9.7 28.1,9.7 28.7,9.7 14.85,9.925 11.9,10.2 44.4,10.25 56.4,10.25 94.4,10.25 24.5,10.3 25.1,10.3 25.7,10.3 26.3,10.3 26.9,10.3 27.5,10.3 28.1,10.3 28.7,10.3 36.1,10.425 9.6,10.7 43.163,10.763 45.637,10.763 55.163,10.763 57.637,10.763 93.163,10.763 95.637,10.763 24.5,10.9 25.1,10.9 25.7,10.9 26.3,10.9 26.9,10.9 27.5,10.9 28.1,10.9 28.7,10.9 36.85,10.925 6.5,11.4 36.1,11.4 9.6,11.5 24.5,11.5 25.1,11.5 25.7,11.5 26.3,11.5 26.9,11.5 27.5,11.5 28.1,11.5 28.7,11.5 42.65,12 46.15,12 54.65,12 58.15,12 92.65,12 96.15,12 24.5,12.1 25.1,12.1 25.7,12.1 26.3,12.1 26.9,12.1 27.5,12.1 28.1,12.1 28.7,12.1 9.6,12.3 14.825,12.45 24.5,12.7 25.1,12.7 25.7,12.7 26.3,12.7 26.9,12.7 27.5,12.7 28.1,12.7 28.7,12.7 6.1,13 9.6,13.1 43.163,13.237 45.637,13.237 55.163,13.237 57.637,13.237 93.163,13.237 95.637,13.237 24.5,13.3 25.1,13.3 25.7,13.3 26.3,13.3 26.9,13.3 27.5,13.3 28.1,13.3 28.7,13.3 44.4,13.75 56.4,13.75 94.4,13.75 14.8,13.9 24.5,13.9 25.1,13.9 25.7,13.9 26.3,13.9 26.9,13.9 27.5,13.9 28.1,13.9 28.7,13.9 9.6,14.8 12,15.1 45.9,15.1 8.9,15.6 9.6,16.1 12,16.2 13.4,16.2 14.7,16.2 1.575,16.8 2.175,16.8 1.575,17.4 2.175,17.4 50.4,17.5 51,17.5 9.1,17.7 12,17.7 13.4,17.7 14.7,17.7 50.4,18.1 51,18.1 3.7,18.2 20.4,18.3 43.7,18.7 44.3,18.7 37.5,19.2 43.7,19.3 44.3,19.3 27,19.8 9.2,19.9 3.4,19.975 97.5,19.975 2.322,20.422 4.478,20.422 96.422,20.422 98.578,20.422 28.1,21 53.7,21 54.3,21 22,21.2 23.6,21.2 25.2,21.2 26.8,21.2 30.8,21.2 38.3,21.2 34.7,21.3 8.1,21.4 1.875,21.5 4.925,21.5 95.975,21.5 99.025,21.5 53.7,21.6 54.3,21.6 2.322,22.578 4.478,22.578 96.422,22.578 98.578,22.578 46.4,22.9 3.4,23.025 97.5,23.025
GPIO0: JMS583.3 W25X20.2 | length 30.6
  Top Layer w0.15: W25X20.2@7.195,4.735 10.365,4.735 11,4.1 17.072,4.1 19.047,2.125 24.325,2.125 v1(24.9,2.7) ; JMS583.3@30.6,9.6 31.378,9.6 31.678,9.3 v1(31.8,9.3)
  Bottom Layer w0.15: v1(24.9,2.7) 26.35,4.15 27.654,4.15 31.8,8.296 v1(31.8,9.3)
GPIO1: JMS583.4 W25X20.6 | length 26.5
  Top Layer w0.15: W25X20.6@12.605,3.465 13.409,3.465 13.744,3.8 16.99,3.8 18.935,1.855 24.905,1.855 v1(25.7,2.65) ; JMS583.4@30.6,10 31.478,10 31.492,10.014 31.714,10.014 v1(31.8,10.1)
  Bottom Layer w0.15: v1(25.7,2.65) 26.93,3.88 27.766,3.88 32.3,8.414 32.3,9.7 31.9,10.1 v1(31.8,10.1)
GPIO2: JMS583.5 W25X20.5 | length 28.3
  Top Layer w0.15: W25X20.5@12.605,2.195 13.296,2.195 14.631,3.53 16.878,3.53 18.823,1.585 25.435,1.585 v1(26.5,2.65) ; JMS583.5@30.6,10.4 31.3,10.4 31.5,10.6 32.2,10.6 v1(32.6,10.2)
  Bottom Layer w0.15: v1(26.5,2.65) 27.46,3.61 27.878,3.61 32.6,8.332 v1(32.6,10.2)